# Altium PCB correctCore.PcbDoc (part 2 of 2)
Units mil, origin at the board's own origin, x right, y up, seen from the top; angles counter-clockwise.
Board outline 4175 x 4095 mil, 4 copper layers (Top Layer, GND, PWR, Bottom Layer), stack 43.711 mil thick; 90 components, 157 nets, 637 pads, 423 vias.
Unrouted connection lines stored in the file: 94.
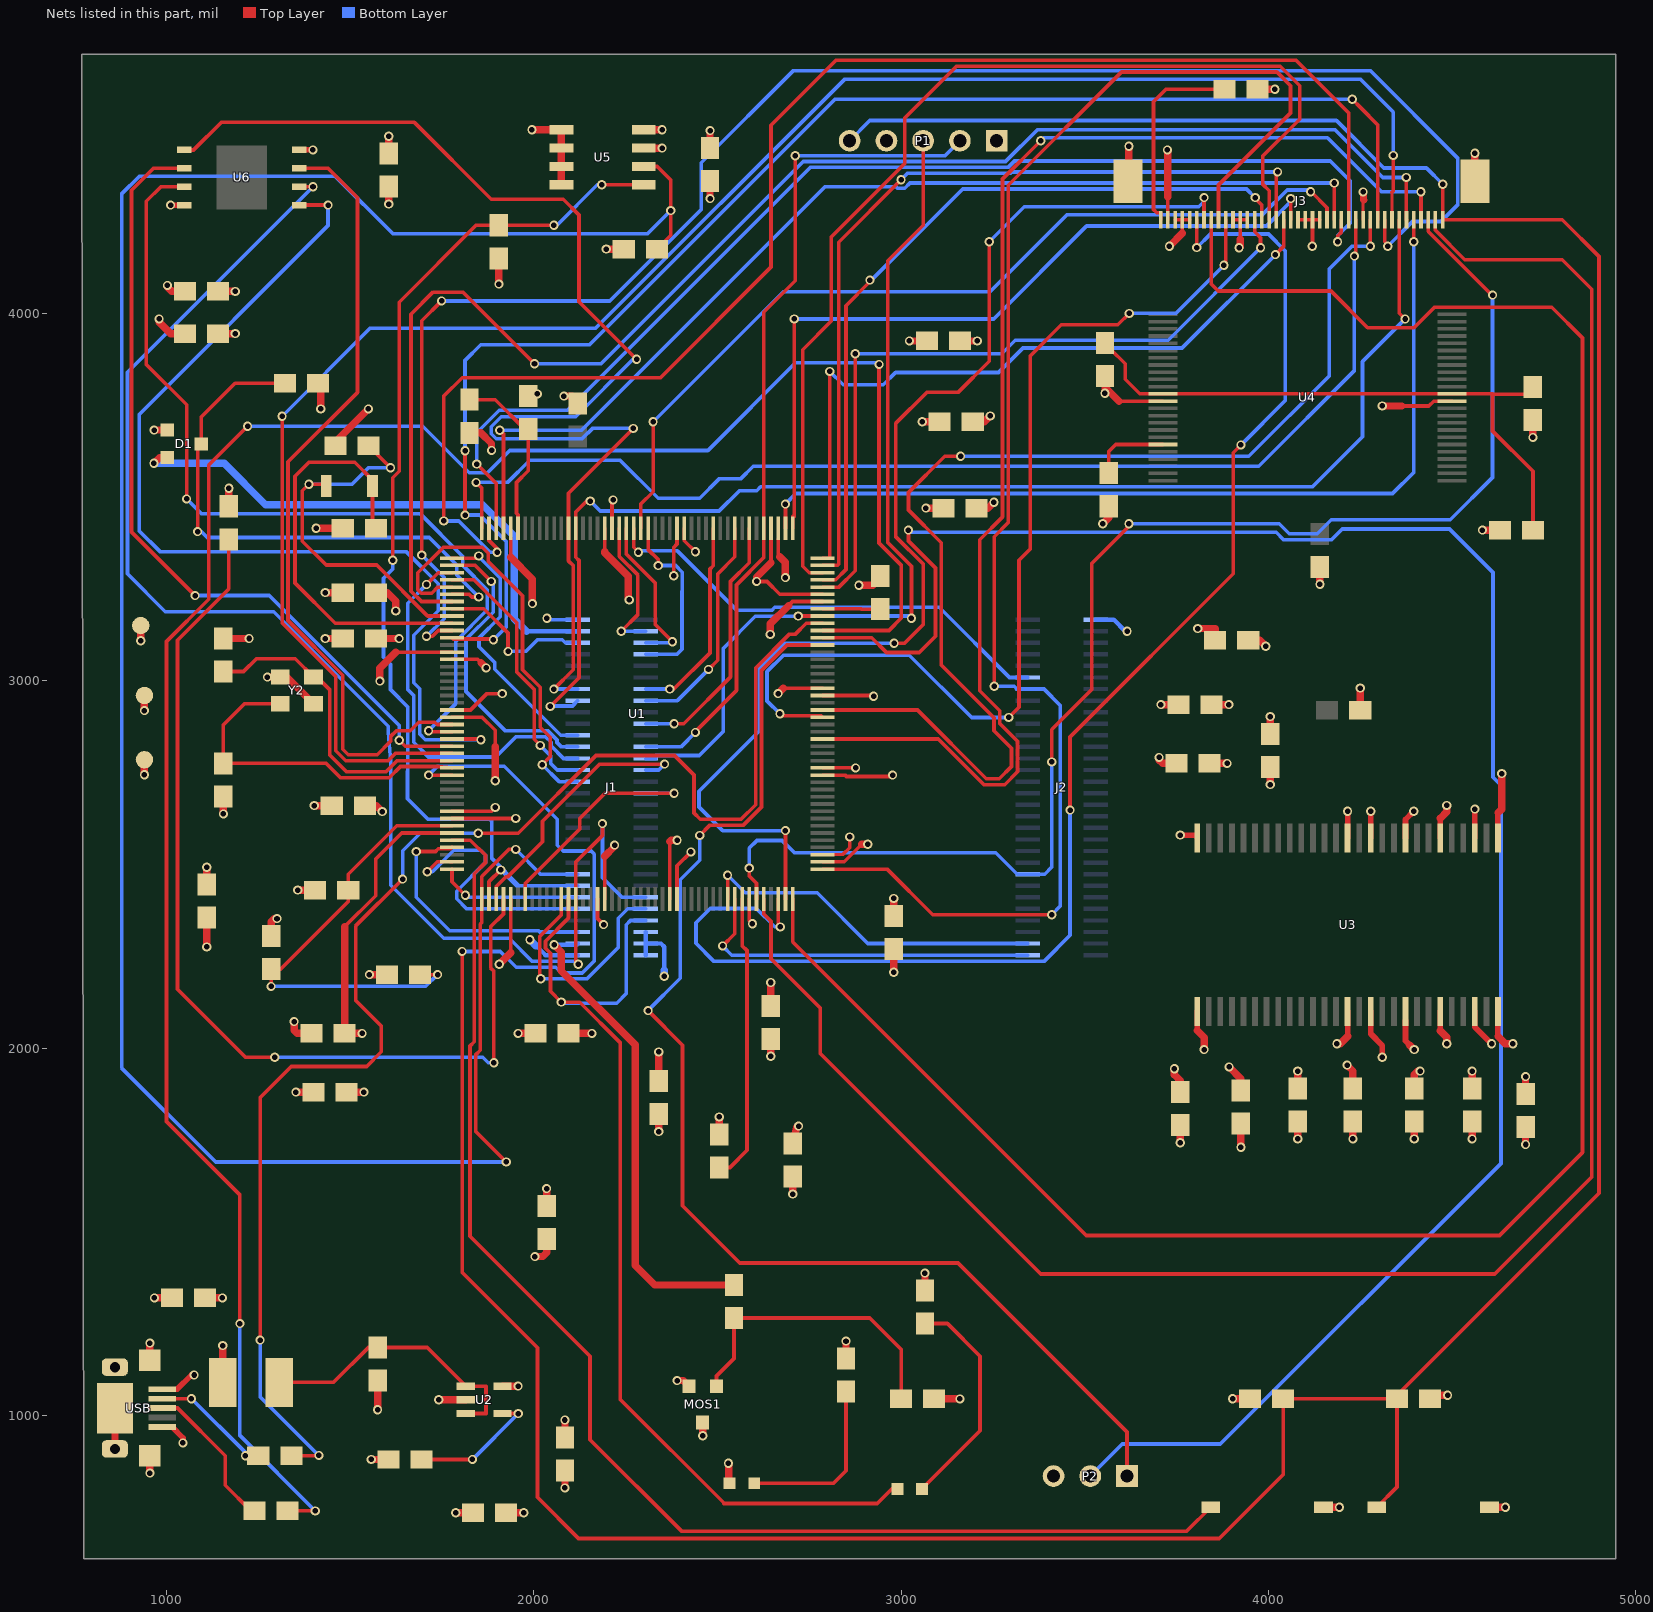
[diagram p4: the nets of this part, all layers, seen from the top]

## Via types
v1: diameter 25, hole 15, Top Layer to Bottom Layer, tented both sides, 423 vias

## Nets (pads, with @x,y where several pads share a name; then routed paths per layer and width w, separated by ;. In a path a pad name is that pad's centre, name@x,y a point inside that pad or via, vN(x,y) a via of type N, cw(c..) or ccw(c..) an arc to the next point about the centre after c; other vN are vias at no path point) (continued)
GND: C1.2 C2.1 C3.2 C4.1 C5.2 C6.1 C7.1 C8.1 C9.1 C10.1 C11.1 C12.2 C13.1 C14.1 C15.1 C16.1 C17.1 C18.1 C19.1 C20.1 C21.1 C22.1 C23.1 C24.1 C25.1 C26.1 C27.1 C28.1 C29.1 C30.1 C31.1 C32.1 C33.2 C34.2 C35.1 C36.1 C37.1 C38.1 C39.1 C40.1 C41.1 C42.1 C43.1 C44.2 C45.2 GND.1 J1.1 J1.30 J2.31 J3.3 J3.4 J3.5 J3.11 J3.12 J3.13 J3.20 J3.21 J3.22 J3.23 J3.29 J3.A J3.B P1.1 P2.3 PWR.2 R1.2 R4.2 R7.2 R14.1 RST.2 U1.14 U1.22 U1.37 U1.61 U1.71 U1.90 U1.102 U1.113 U1.126 U1.135 U1.148 U1.158 U2.2 U3.6 U3.12 U3.28 U3.41 U3.46 U3.52 U3.54 U4.13 U4.36 U5.1 U5.2 U5.3 U5.4 U5.7 U6.4 USB.5 USB.6 USB.7 USB.8 USB.9 Y2.2 Y2.4 | length 7367.9
  Top Layer w9: 2665.74,3337.25 U1.135@2665.74,3385 ; J3.29@4257.5,4255 4257.5,4304
  Top Layer w9.8: 3765.67,4217.78 J3.4@3765.67,4255
  Top Layer w9.84: 3593.26,3761.26 U4.13@3712.6,3761.26 ; J3.3@3745.98,4255 J3.4@3765.67,4255 J3.5@3785.35,4255 ; J3.11@3903.46,4255 J3.12@3923.15,4255 ; 3923.15,4201.91 J3.12@3923.15,4255 ; J3.13@3942.83,4255 J3.12@3923.15,4255 ; J3.20@4080.63,4255 J3.21@4100.32,4255 J3.22@4120,4255 ; v1@4120,4183.11 J3.22@4120,4255 ; J3.23@4139.69,4255 J3.22@4120,4255 ; 4363,3748 4436.74,3748 4450,3761.26 U4.36@4500,3761.26
  Top Layer w10: 1624.4,3077.78 U1.14@1777.18,3077.78 ; U1.37@1777.18,2625.02 v1@1940,2625.02 ; U1.22@1777.18,2920.3 1827.76,2920.3 1872.47,2965 v1(1914,2965) ; U1.61@2173.46,2405.91 2173.46,2352.54 v1(2190,2336) ; U1.158@2212.83,3415 2212.83,3489.09 v1(2216,3492.26) ; U1.71@2370.31,2405.91 2370.31,2562.31 ; U1.148@2409.68,3415 2409.68,3381.32 v1(2440,3351) ; 2693.87,3204.97 2704.47,3215.57 U1.126@2786.28,3215.57 ; U1.90@2786.28,2506.91 2844.91,2506.91 2893,2555 ; U1.102@2786.28,2743.13 2847.63,2743.13 2851.45,2739.32 2973.19,2739.32 v1(2977,2743.13) ; U1.113@2786.28,2959.67 v1@2923.33,2959.67
  Top Layer w15: v1(1011.32,4295) U6.4@1048.5,4295 ; 3806.02,2047.73 U3.28@3806.02,2100 ; 4215.47,2031.99 U3.41@4215.47,2100 ; U3.12@4278.46,2572.44 v1(4278.46,2644.6) ; U3.6@4467.44,2572.44 4467.44,2625.18 ; 4624.92,2031.99 U3.54@4624.92,2100
  Top Layer w15.75: USB.5@989,968.82 1015,968.82 1045,938.82 v1(1045,925) ; U3.46@4372.95,2075 4372.95,2019.85 4385,2007.81 ; U3.52@4561.93,2100 4561.93,2057.38 v1(4607.47,2011.84)
  Top Layer w20: USB.7@859.65,908.78 860,908.78 USB.9@860,1020 ; v1(940,2918.88) GND.1@940,2960 ; v1(955,842.97) USB.8@955,890 ; USB.9@955,1150 v1(955,1197.03) ; v1(967.5,1320) C33.2@1015,1320 ; C11.1@1155,3115 v1(1225,3115) ; v1(1155.06,2637.5) C10.1@1155.06,2685 ; R1.2@1170,3475 v1(1170,3524) ; v1(1275,3010) Y2.4@1310,3010 1327.72,3010 Y2.2@1400.55,2937.17 ; v1(1347.5,2072) 1347.5,2048 1355.5,2040 C7.1@1395,2040 ; v1(1352.5,1880) C6.1@1400,1880 ; v1(1357.5,2430) C2.1@1405,2430 ; v1(1402.5,2660) C15.1@1450,2660 ; v1(1407.5,3415) C9.1@1455,3415 ; v1(1420,3740) C1.2@1420,3803.75 ; v1(1432.5,3114.94) C14.1@1480,3114.94 ; v1(1432.5,3240) C13.1@1480,3240 ; C8.1@1460,3640 1460,3650 v1(1550,3740) ; v1(1552.5,2200) C4.1@1600,2200 ; v1(1557.5,880) C30.1@1605,880 ; v1(1575,1015.5) C29.1@1575,1095 ; v1(1581,2999) 1581,3034.38 1624.4,3077.78 ; v1(1605,4297.5) C44.2@1605,4345 ; v1(1741.21,1042.4) U2.2@1815,1042.4 ; v1(1787.5,735) C31.1@1835,735 ; v1(1957.5,2039.94) C16.1@2005,2039.94 ; R4.2@1985,3775 1991,3781 v1(2010,3781) ; v1(1995,4500) U5.1@2075,4500 U5.2@2075,4450 U5.3@2075,4400 U5.4@2075,4350 ; v1(2003,1432.5) 2024,1432.5 2035,1443.5 C27.1@2035,1480 ; v1(2082.25,3775) 2105,3775 2120,3760 R7.2@2120,3755 ; C32.1@2085,940 v1(2085,987.5) ; U5.7@2299.41,4450 v1(2349.41,4450) ; v1(2340,1772.5) C17.1@2340,1820 ; 2370.31,2562.31 2374,2566 v1(2390,2566) ; v1(2479.94,4312.5) C45.2@2479.94,4360 ; C3.2@2505,1765 v1(2505,1812.5) ; v1(2530,870) 2530.96,869.04 2530.96,817.12 PWR.2@2533.07,815 ; v1(2644,3126) 2644,3155.1 2693.87,3204.97 ; v1(2645,1977.5) C18.1@2645,2025 ; 2669.74,3337.25 2684.32,3322.68 2684.32,3281.96 v1(2685.27,3281) ; v1(2705,1602.5) C19.1@2705,1650 ; v1(2885,3260) 2923.51,3260 2943.51,3280 C5.2@2943.51,3285 ; 2893,2555 v1(2909,2555) ; v1@2923.33,2959.67 v1(2925,2958) ; v1(2980,2206.5) C34.2@2980,2270 ; R14.1@3095,1045 v1(3160,1045) ; C25.1@3160,3925.06 v1(3207.5,3925.06) ; C24.1@3195,3705.06 3226.5,3705.06 v1(3242.5,3721.06) ; C23.1@3205,3470 3236.5,3470 v1(3252.5,3486) ; v1(3555,3782.5) 3555,3799.52 ; C36.1@3555,3830 3555,3799.52 ; 3593.26,3761.26 3555,3799.52 ; J3.A@3618.03,4359.43 3620,4361.39 v1(3620,4455) ; v1(3730.47,4182.59) 3765.67,4217.78 ; v1(3760.06,1742.5) C37.1@3760.06,1790 ; 3806.02,2047.73 3825,2028.75 v1(3825,1995.84) ; C21.1@3840,2775.06 v1(3887.5,2775.06) ; C20.1@3845,2935.06 v1(3892.5,2935.06) ; v1(3920,4178.52) 3923.15,4181.67 3923.15,4201.91 ; v1(3925,1730) C38.1@3925,1795 ; C22.1@3945,3110.06 3976.5,3110.06 v1(3992.5,3094.06) ; C28.1@3970,4610 v1(4017.5,4610) ; v1(4005,2717.5) C26.1@4005,2765 ; v1(4080,1752.5) C39.1@4080,1800 ; v1(4119.47,4182.59) v1@4120,4183.11 ; v1(4186.47,2011.84) 4195.32,2011.84 4215.47,2031.99 ; v1(4230,1752.5) C40.1@4230,1800 ; v1(4257.8,4330.72) 4258.75,4329.77 4258.75,4308.91 4259.04,4308.62 ; v1(4310,3748) 4363,3748 ; 4385,2007.81 v1(4396.97,1995.84) ; v1(4396.97,1752.5) C41.1@4396.97,1800 ; C12.2@4440,1055 v1(4487.5,1055) ; 4467.44,2625.18 4485.47,2643.22 v1(4485.47,2660.6) ; v1(4554.45,1752.5) C42.1@4554.45,1800 ; J3.B@4561.91,4359.43 v1(4561.91,4435.98) ; RST.2@4602.09,750 v1(4645.18,750) ; 4624.92,2031.99 4645.07,2011.84 v1(4665.47,2011.84) ; v1(4700,1737.5) C43.1@4700,1785 ; v1(4720,3662.5) C35.1@4720,3710
  Bottom Layer w10: v1@2039.41,3166.39 J1.30@2119.96,3166.39
  Bottom Layer w11.81: 2005.7,2279 2031.7,2253 J1.1@2119.96,2253 ; J2.31@3529.39,3166.39 3578.61,3166.39 3610.11,3134.89 v1(3615.05,3134.89)
  Bottom Layer w20: v1(1989.7,2295) 2005.7,2279
  other v1: 1951,2625.02 2035.8,3170
IIC_SCL: J1.8 R20.1 U1.45 U5.6 | length 6568.4
  Top Layer w10: v1(1925,1690) 1842.5,1772.5 1842.5,1982.5 1854,1994 1854,2337.5 1858.5,2342 U1.45@1858.5,2405.91 1858.5,2466.76 1932.74,2541 v1(1951,2541) ; U5.6@2299.41,4400 2336,4400 2373,4363 v1(2373,4280) 2373,4213.06 R20.1@2335,4175.06
  Bottom Layer w10: v1(1925,1690) 1134,1690 878,1946 878,4325 926,4373 1460,4373 1616.5,4216.5 2309.5,4216.5 v1(2373,4280) ; v1(1951,2541) 2018.53,2473.47 J1.8@2119.96,2473.47
IIC_SDA: J1.7 R21.1 U1.46 U5.5 | length 2976.4
  Top Layer w10: v1(1616,3328) 1616,3552.77 1633.5,3570.27 1633.5,4030.63 1842.87,4240 R21.1@1904.94,4240 v1(2055,4240) ; U1.46@1878.19,2405.91 1878.19,2453.21 v1(1909.98,2485) ; v1(2185,4350) U5.5@2299.41,4350
  Bottom Layer w10: v1(1616,3328) 1616,3304 1591.02,3279.02 1591.02,3063.62 1610,3044.65 1610,2976 1657.27,2928.73 1657.27,2753.63 1656.5,2752.86 1656.5,2678.5 1712,2623 1880,2623 1886,2617 1886,2515.98 1960,2441.98 ; v1(1909.98,2485) 1953,2441.98 1960,2441.98 ; v1(2055,4240) 2063,4240 2173,4350 v1(2185,4350) ; J1.7@2119.96,2441.98 1960,2441.98
JTCK: J1.42 P1.2 U1.137 | length 2298.6
  Top Layer w10: v1(2440,2859.43) 2440,2862 2551.75,2973.75 2551.75,3260.75 2626.22,3335.22 U1.137@2626.22,3415 2626.22,4003.22 2712,4089 v1(2712,4429)
  Bottom Layer w10: J1.42@2305,2819.93 2400.5,2819.93 v1(2440,2859.43) ; v1(2712,4429) 2712.47,4429.47 3119.47,4429.47 P1.2@3160,4470
JTMS: J1.43 P1.3 U1.124 | length 2456.6
  Top Layer w10: v1(2720,3176.2) U1.124@2786.28,3176.2 ; v1(3028.09,3170) 3028.09,3311.91 2963.5,3376.5 2963.5,4143.5 3060,4240 P1.3@3060,4470
  Bottom Layer w10: J1.43@2305,2788.43 2332.5,2788.43 2332.5,2796.44 2450.31,2796.44 2515.5,2861.63 2515.5,3088 2603,3175.5 2719.3,3175.5 v1(2720,3176.2) 3021.89,3176.2 v1(3028.09,3170)
KEY0: J1.6 U1.44 | length 398.1
  Top Layer w10: U1.44@1777.18,2487.23 1777.18,2452.64 v1(1813.82,2416)
  Bottom Layer w10: v1(1813.82,2416) 1813.82,2410.48 J1.6@2119.96,2410.48
KEY1: J1.5 U1.43 | length 736.1
  Top Layer w10: v1(1710,2480) 1736.91,2506.91 U1.43@1751,2506.91 ; U1.43@1773.5,2506.91 U1.43@1777.18,2506.91
  Bottom Layer w10: v1(1710,2480) 1724,2480 1782.5,2538.5 1854.73,2538.5 1868.5,2524.73 1868.5,2505.27 1790.32,2427.09 1790.32,2406.27 1817.09,2379.5 1976.98,2379.5 1977.5,2378.98 J1.5@2119.96,2378.98
KEY2: J1.28 U1.8 | length 436.3
  Top Layer w10: U1.8@1777.18,3195.89 1864,3195.89 1930,3129.89 v1(1930,3080)
  Bottom Layer w10: v1(1930,3080) 1978.67,3080 2010.07,3111.4 2077.5,3111.4 2085.5,3103.39 J1.28@2119.96,3103.39
LCD_B3: J3.24 U1.154 | length 2452.6
  Top Layer w9.84: v1(4114.72,4331) 4116.37,4331 4159.37,4288 J3.24@4159.37,4255
  Top Layer w10: U1.154@2291.57,3415 2291.57,3481 2325,3514.43 v1(2325,3705)
  Bottom Layer w10: v1(2325,3705) 2679,4059 3242,4059 3452,4269 3984.09,4269 4051.21,4336.12 4109.6,4336.12 v1(4114.72,4331)
LCD_B4: J3.25 U1.173 | length 2924.8
  Top Layer w9.84: J3.25@4179.06,4255 v1@4179.06,4354.94
  Top Layer w10: v1(1907.51,3682) 1917.56,3671.95 U1.173@1917.56,3415 ; v1(4179,4355) v1@4179.06,4354.94
  Bottom Layer w10: v1(1907.51,3682) 2130.23,3682 2792.73,4344.5 2986.27,4344.5 2990.27,4340.5 3009.73,4340.5 3024.23,4355 v1(4179,4355)
LCD_B5: J3.26 U1.174 | length 3232.3
  Top Layer w9.84: v1(4188.32,4195) 4188.32,4211.42 4198.74,4221.84 J3.26@4198.74,4255
  Top Layer w10: v1(1845,3590) 1897.87,3537.13 U1.174@1897.87,3415
  Bottom Layer w10: v1(1845,3590) 1845,3675.36 1905.97,3736.33 2091.65,3736.33 2752.79,4397.47 3291.1,4397.47 3308.63,4415 4168,4415 4222,4361 4222,4245.1 4188.32,4211.42 v1(4188.32,4195)
LCD_B6: J3.27 U1.175 | length 4012.4
  Top Layer w9.84: J3.27@4218.43,4255 4218.43,4545.57
  Top Layer w10: v1(1755,3435) 1755,3775 1805,3825 2345,3825 2646,4126 2646,4512 2823,4689 4075,4689 4218.43,4545.57 ; U1.175@1878.19,3415 1878.19,3381.65 1900,3359.84 v1(1900,3350)
  Bottom Layer w10: v1(1755,3435) 1795.77,3435 1880.77,3350 v1(1900,3350)
LCD_B7: J3.28 U1.176 | length 3146.8
  Top Layer w9.84: v1@4238.11,4160.11 J3.28@4238.11,4255
  Top Layer w10: v1(1843,3540) 1858.5,3524.5 U1.176@1858.5,3415 ; v1(4234,4156) v1@4238.11,4160.11
  Bottom Layer w10: v1(1843,3540) 1928.5,3540 1989,3600.5 2234.94,3600.5 2338.69,3496.75 2451.75,3496.75 2504.5,3549.5 2563.09,3549.5 2597.66,3584.08 3973.74,3584.08 4234,3844.34 v1(4234,4156)
LCD_BL: J1.23 J3.34 U1.163 | length 3541.5
  Top Layer w9.84: 4356.22,4000.56 J3.34@4356.22,4255
  Top Layer w10: v1(2045,2930) 2123.3,3008.3 2123.3,3327.11 2114.41,3336 U1.163@2114.41,3415 2114.41,3459.55 2143.95,3489.09 v1(2154,3489.09) ; 4356.22,4000.56 v1(4372,3984.78)
  Bottom Layer w10: v1(2045,2930) 2046.32,2931.32 2105.37,2931.32 J1.23@2119.96,2945.91 ; v1(2154,3489.09) 2181.09,3462 2504.5,3462 2560,3517.5 2607,3517.5 2617.5,3528 4120,3528 4256,3664 4256,3868.78 v1(4372,3984.78)
LCD_CLK: J3.30 U1.111 | length 3245.6
  Top Layer w9.84: v1(4277.48,4182.59) J3.30@4277.48,4255
  Top Layer w10: U1.111@2786.28,2920.3 3044.7,2920.3 3232,2733 3267,2733 3300.5,2766.5 3300.5,2816.25 3252.75,2864 3252.75,2899.5 3109.5,3042.74 3109.5,3375.5 3020,3465 3020,3512.5 3118.5,3611 v1(3162,3611)
  Bottom Layer w10: v1(3162,3611) 3946.5,3611 4166,3830.5 4166,4121.23 4227.35,4182.59 v1(4277.48,4182.59)
LCD_DE: J3.33 U1.28 | length 5042.7
  Top Layer w9: J3.33@4336.54,4255 4336.54,4329.77
  Top Layer w10: v1(1315,3720) 1315,3157.37 1461,3011.37 1461,2809.57 1488.14,2782.43 1603.35,2782.43 1623.1,2802.19 U1.28@1777.18,2802.19 ; 4336.54,4329.77 4340,4333.23 v1(4340,4430)
  Bottom Layer w10: v1(1315,3720) 1555,3960 2169,3960 2846,4637 4251,4637 4340,4548 v1(4340,4430)
LCD_G2: J3.14 U1.128 | length 2004
  Top Layer w9.84: J3.14@3962.52,4255 3962.52,4222.01 3978.52,4206.01
  Top Layer w10: U1.128@2786.28,3254.94 2830.83,3254.94 2875,3299.11 v1(2875,3890) ; v1(3978.52,4178.52) 3978.52,4206.01
  Bottom Layer w10: v1(2875,3890) 3274,3890 3311,3927 3727,3927 v1(3978.52,4178.52)
LCD_G3: J3.15 U1.129 | length 2095.5
  Top Layer w9: 3982.2,4279 3982.2,4294.45
  Top Layer w10: U1.129@2786.28,3274.63 2821.91,3274.63 2850,3302.72 2850,4021 2915,4086 v1(2915,4090.75) ; v1(3964.03,4315.17) 3964.03,4312.62 3982.2,4294.45
  Bottom Layer w10: v1(2915,4090.75) 2919.75,4090.75 3167.67,4338.67 3940.53,4338.67 v1(3964.03,4315.17)
LCD_G4: J3.16 U1.130 | length 2966.3
  Top Layer w9.84: J3.16@4001.89,4255 4001.89,4334.23
  Top Layer w10: U1.130@2786.28,3294.31 2749.69,3294.31 2732,3312 2732,3901 2810,3979 2810,4208 3010,4408 3010,4532 3151,4673 4032,4673 4085,4620 4085,4528.5 3984.09,4427.59 3984.09,4352.03 4001.89,4334.23
LCD_G5: J3.17 U1.131 | length 2326.9
  Top Layer w9.84: J3.17@4021.57,4255 4021.57,4358.43
  Top Layer w10: U1.131@2786.28,3314 2826,3314 2830,3318 2830,4194 v1(3000,4364) ; 4021.57,4358.43 4021.57,4381.57 v1(4025,4385)
  Bottom Layer w10: v1(3000,4364) 3017.47,4381.47 3297.73,4381.47 3301.25,4385 v1(4025,4385)
LCD_G6: J3.18 U1.132 | length 2007.2
  Top Layer w9.84: 4041.26,4182.26 J3.18@4041.26,4255
  Top Layer w10: U1.132@2786.28,3333.68 2806,3333.68 v1(2806,3842) ; v1(4019,4160) 4041.26,4182.26
  Bottom Layer w10: v1(2806,3842) 2842.5,3805.5 2951.5,3805.5 2985,3839 3265,3839 3332,3906 3765,3906 v1(4019,4160)
LCD_G7: J3.19 U1.133 | length 2124.2
  Top Layer w9.84: J3.19@4060.94,4255 v1(4060.94,4312.62)
  Top Layer w10: U1.133@2704.96,3415 2704.96,3447 2709,3447 v1(2709,3985)
  Bottom Layer w10: v1(2709,3985) 3252,3985 3505,4238 3994.63,4238 4060.94,4304.32 v1(4060.94,4312.62)
LCD_HSYNC: J3.31 U1.12 | length 4026.3
  Top Layer w9.84: 4252,4559 4297.17,4513.83 J3.31@4297.17,4255
  Top Layer w10: U1.12@1777.18,3117.15 1780.87,3113.46 1888.09,3113.46 v1(1890.15,3111.4) ; v1(1813,3451) v1(1813,3626) ; v1(4228,4583) 4252,4559
  Bottom Layer w10: v1(1813,3451) 1852.88,3451 1925,3378.88 1925,3146.25 v1(1890.15,3111.4) ; v1(1813,3626) 1813,3872 1856,3915 2152,3915 2820,4583 v1(4228,4583)
LCD_R3: J3.6 U1.86 | length 3925.8
  Top Layer w9.84: v1(3805,4179) J3.6@3805.04,4255
  Top Layer w10: U1.86@2665.59,2405.91 2665.59,2335.41 v1(2671,2330) ; v1(3460,2648) 3460,2847 3904,3291 3904,3621 v1(3925,3642) ; v1(3805,4179) v1(3805,4179)
  Bottom Layer w10: v1(2671,2330) 2656,2330 2606,2380 2480.28,2380 2441.5,2341.22 2441.5,2285.27 2490.77,2236 3389,2236 3460,2307 v1(3460,2648) ; v1(3805,4179) 3842,4216 4000,4216 4046,4170 4046,3763 v1(3925,3642)
LCD_R4: J3.7 U1.87 | length 3298
  Top Layer w9.84: J3.7@3824.72,4255 3824.72,4304.72 v1@3825,4305
  Top Layer w10: U1.87@2685.27,2405.91 v1(2685.27,2592) ; v1(2981,3102) 3009.22,3102 3060,3152.78 3060,3317.63 2985,3392.63 2985,3700 3070,3785 3155,3785 3240,3870 v1(3240,4195)
  Bottom Layer w10: v1(2685.27,2592) 2514.03,2592 2450.03,2656 2450.03,2699.4 2614,2863.37 2614,3033.37 2682.63,3102 v1(2981,3102) ; v1(3240,4195) 3335,4290 3810,4290 v1@3825,4305
  other v1: 3825,4315.17
LCD_R5: J3.8 U1.88 | length 6201.4
  Top Layer w9.84: 3844.41,4080 J3.8@3844.41,4255
  Top Layer w10: U1.88@2704.96,2405.91 2704.96,2289.03 3503.99,1490 4629,1490 4855,1716 4855,3933 4771,4017 4452,4017 4396,3961 4270,3961 4170,4061 3863.41,4061 3844.41,4080
LCD_R6: J2.24 J3.9 U1.89 | length 4193.3
  Top Layer w9.84: J3.9@3864.09,4255 3864.09,4349.52
  Top Layer w10: U1.89@2786.28,2487.23 2961.77,2487.23 3086,2363 v1(3410,2363) ; v1(3253.5,2985) 3253.5,3392 3292,3430.5 3292,4348.77 3600.23,4657 4023,4657 4060,4620 4060,4545.43 3864.09,4349.52
  Bottom Layer w10: v1(3253.5,2985) 3307.91,2985 3315.5,2977.41 J2.24@3344.35,2977.41 3389,2977.41 3433.5,2932.91 3433.5,2386.5 v1(3410,2363)
LCD_R7: J3.10 U1.110 | length 2760.5
  Top Layer w9.84: v1@3883.78,4135.78 J3.10@3883.78,4255
  Top Layer w10: v1(2670,2910) 2675.7,2904.3 2782.59,2904.3 U1.110@2786.28,2900.61 ; v1(3293,2900) 3321,2928 3321,3328 3352,3359 3352,3885 3436,3969 3590,3969 v1(3621,4000) ; v1(3879,4131) v1@3883.78,4135.78
  Bottom Layer w10: v1(2670,2910) 2635,2945 2635,3024.83 2679.67,3069.5 3022.5,3069.5 3192,2900 v1(3293,2900) ; v1(3621,4000) 3748,4000 v1(3879,4131)
LCD_VSYNC: J3.32 U1.11 | length 4695.3
  Top Layer w9.84: J3.32@4316.85,4255 4316.85,4195.15 4325,4187 v1(4325,4182.59)
  Top Layer w10: v1(1695,3342) 1695,3980 v1(1749,4034) ; v1(1708,3121) 1724,3121 1739.83,3136.83 U1.11@1777.18,3136.83
  Bottom Layer w10: v1(1695,3342) 1756,3281 1756,3169 v1(1708,3121) ; v1(1749,4034) 2207,4034 2456,4283 2456,4410 2707,4661 4277,4661 4515,4423 4515,4295 4470,4250 4392.41,4250 v1(4325,4182.59)
LED0: DS0.2 J1.57 U1.57 | length 2824.4
  Top Layer w10: U1.57@2094.72,2405.91 2094.72,2353.79 2031.85,2290.92 2031.85,2271.46 2045.5,2257.81 2045.5,2154.54 v1(2075.04,2125) 2125,2125 2235,2015 2235,1044 2517,762 ; 2517,760 2935,760 2975,800 DS0.2@2990,800
  Bottom Layer w10: v1(2075.04,2125) 2078.16,2121.87 2225.62,2121.87 2252,2148.26 2252,2336 2263.49,2347.49 J1.57@2305,2347.49
LED1: J1.56 U1.56 | length 654.7
  Top Layer w10: v1(2019,2188.5) 2015.85,2191.65 2015.85,2302.82 2075.04,2362 U1.56@2075.04,2405.91
  Bottom Layer w10: v1(2019,2188.5) 2145,2188.5 2230.2,2273.7 2230.2,2353.18 2256,2378.98 J1.56@2305,2378.98
NetC1_1: C1.1 D1.3 U1.6 | length 1519.8
  Top Layer w10: v1(1085,3406) 1085,3635 D1.3@1095,3645 1095,3718 1186.94,3809.94 C1.1@1330,3809.94 ; U1.6@1777.18,3235.26 1823.94,3235.26 1831.16,3228.03 v1(1850,3228.03)
  Bottom Layer w10: v1(1085,3406) 1095,3406 1111,3390 1715.5,3390 1790.3,3315.2 1790.3,3287.73 v1(1850,3228.03)
NetC2_2: C2.2 C4.2 R2.1 U1.38 | length 1258.7
  Top Layer w10: v1(1285,2168) R2.1@1285,2215 1311,2215 1495,2399 C2.2@1495,2430 1495,2473.34 1627,2605.34 U1.38@1777.18,2605.34 ; C4.2@1690,2200 v1(1738,2200)
  Bottom Layer w10: v1(1285,2168) 1706,2168 v1(1738,2200)
NetC3_1: C3.1 U1.81 | length 784.7
  Top Layer w10: C3.1@2505,1675 2534,1675 2580.52,1721.52 2580.52,2265.48 2567.16,2278.84 U1.81@2567.16,2405.91
NetC5_1: C5.1 U1.125 | length 157.6
  Top Layer w10: U1.125@2786.28,3195.89 2891,3195.89 2891.89,3195 C5.1@2943.51,3195
NetC8_2: C8.2 U1.9 Y1.1 | length 1028.6
  Top Layer w10: Y1.1@1435,3530 1430,3535 v1(1388,3535) 1370,3517 1370,3380 1435,3315 1572.25,3315 1711.04,3176.2 U1.9@1777.18,3176.2 ; C8.2@1550,3640 v1(1610,3580)
  Bottom Layer w10: v1(1388,3535) 1505,3535 1550,3580 v1(1610,3580)
NetC9_2: C9.2 U1.10 Y1.2 | length 1148.5
  Top Layer w10: C9.2@1545,3415 1560.98,3430.98 Y1.2@1560.98,3530 1560.98,3546.5 1512.48,3595 1388,3595 1350,3557 1350,3266 1459.48,3156.52 U1.10@1777.18,3156.52
NetC10_2: C10.2 U1.30 Y2.1 | length 934.7
  Top Layer w10: Y2.1@1310,2937.17 1212.23,2937.17 1155.06,2880 C10.2@1155.06,2775 1434.96,2775 1473.87,2736.08 1606.56,2736.08 1637.11,2766.63 1739.49,2766.63 U1.30@1777.18,2762.82
NetC11_2: C11.2 U1.29 Y2.3 | length 876.8
  Top Layer w10: C11.2@1155,3025 1210,3025 1245,3060 1350.55,3060 Y2.3@1400.55,3010 ; Y2.3@1400.54,2998.99 1421.01,2998.99 1445,2975 1445,2796.96 1489.87,2752.08 1597.83,2752.08 1628.38,2782.63 1755.49,2782.63 1755.49,2782.5 U1.29@1777.18,2782.5
NetC28_2: C28.2 J3.1 | length 542.4
  Top Layer w9.84: 3687,4576 3687,4283 3696,4274 3706.61,4274 J3.1@3706.61,4255
  Top Layer w10: 3687,4576 3721,4610 C28.2@3880,4610
NetC29_2: C29.2 F1.2 U2.1 U2.3 | length 776
  Top Layer w10: F1.2@1306.77,1090 1455,1090 1550,1185 C29.2@1575,1185 1709.8,1185 U2.1@1815,1079.8 1870,1079.8 1870,1005 U2.3@1815,1005
NetC30_2: C30.2 U2.4 | length 357.8
  Top Layer w10: C30.2@1695,880 v1(1833,880) ; U2.4@1915,1005 v1(1958,1005)
  Bottom Layer w10: v1(1833,880) v1(1958,1005)
NetC35_2: C35.2 C36.2 R16.1 U4.12 U4.37 | length 1661
  Top Layer w9.84: 3610,3821 3650.05,3780.95 U4.12@3712.6,3780.95 U4.37@4500,3780.95 4610,3780.95
  Top Layer w10: C36.2@3570,3915 3570,3902.63 3610,3862.63 3610,3821 ; R16.1@4720,3410 4720,3570 4610,3680 4610,3780 4700,3780 C35.2@4720,3800
NetDS0_1: DS0.1 R10.2 | length 613.4
  Top Layer w10: DS0.1@3056.93,800 3215,958.07 3215,1161 3126,1250 R10.2@3064.94,1250
NetMOS1_1: MOS1.1 R13.2 R14.2 | length 830.7
  Top Layer w10: MOS1.1@2497.4,1079.21 2497.4,1107.4 2545,1155 R13.2@2545,1265 2915,1265 3000,1180 R14.2@3000,1045
NetPWR_1: PWR.1 R15.1 | length 480.1
  Top Layer w10: PWR.1@2600,815 2816,815 2850,849 R15.1@2850,1065
NetR1_1: R1.1 U1.48 | length 2691.5
  Top Layer w10: R1.1@1170,3385 1170,3250 1030,3110 1030,2160 1215,1975 v1(1295,1975) ; v1(1891.49,1960) 1891.49,2209.27 1882.5,2218.27 1882.5,2329.94 1917.56,2365 U1.48@1917.56,2405.91
  Bottom Layer w10: v1(1295,1975) 1861,1975 1876,1960 v1(1891.49,1960)
NetR4_1: R4.1 R5.1 U1.171 | length 478
  Top Layer w10: R5.1@1825,3765 1895,3765 1975,3685 R4.1@1985,3685 1985,3571.53 1953,3539.53 1953,3455.93 1956.93,3452 U1.171@1956.93,3415
NetR11_2: R11.2 USB.3 | length 400.3
  Top Layer w10: USB.3@989,1020 1030,1020 1160,890 1160,810 R11.2@1227.47,742.53
NetR12_2: R12.2 USB.2 | length 331.9
  Top Layer w10: USB.2@989,1045.59 v1(1068.2,1045.59) ; v1(1215,890.06) 1249.06,890.06 1250,891 R12.2@1250,890.06
  Bottom Layer w10: v1(1068.2,1045.59) 1215,898.79 v1(1215,890.06)
NetR18_1: R18.1 U4.19 | length 214.6
  Top Layer w9.84: 3584,3643.15 U4.19@3712.6,3643.15
  Top Layer w10: R18.1@3565,3565 3565,3624.15 3584,3643.15
NRF_CE: J2.25 U1.155 | length 1285.5
  Top Layer w10: U1.155@2271.89,3415 2271.89,3363.11 v1(2285,3350)
  Bottom Layer w10: v1@2285,3345.5 v1(2285,3350) 2288.5,3353.5 2391,3353.5 2553,3191.5 2647.67,3191.5 2656.17,3200 3103.9,3200 3295,3008.9 J2.25@3344.35,3008.9
NRF_CS: J1.34 U1.153 | length 467
  Top Layer w10: 2311.26,3381.32 2311.26,3357.44 2338.69,3330 v1(2338.69,3313.5)
  Bottom Layer w10: J1.34@2305,3071.9 2389.9,3071.9 2403.5,3085.5 2403.5,3243.73 2404.5,3244.73 2404.5,3295.49 2386.49,3313.5 v1(2338.69,3313.5)
PA0: U1.40 WKUP.1 | length 3671.7
  Top Layer w10: U1.40@1777.18,2565.97 1827.27,2565.97 1868.5,2524.73 1868.5,2505.27 1838,2474.77 1838,2017 1826.5,2005.5 1826.5,1487.5 2153,1161 2153,934 2402,685 3777.91,685 WKUP.1@3842.91,750
PA1: J1.3 U1.41 | length 705.4
  Top Layer w10: v1(1680,2535) 1732.55,2535 1740.15,2542.6 1773.5,2542.6 U1.41@1777.18,2546.28
  Bottom Layer w10: v1(1680,2535) 1680,2410.63 1771.14,2319.48 2013.2,2319.48 2016.7,2315.99 J1.3@2119.96,2315.99
PA3: J1.44 U1.47 | length 720.8
  Top Layer w10: U1.47@1897.87,2405.91 1897.87,2440 1923.87,2466 1928.5,2466 2023.9,2561.4 2023.9,2617.73 2179.1,2772.94 v1(2356,2772.94)
  Bottom Layer w10: J1.44@2305,2756.94 2340,2756.94 v1(2356,2772.94)
PA5: J1.46 U1.51 | length 643
  Top Layer w10: U1.51@1976.61,2405.91 1976.61,2448 2124.98,2596.36 2124.98,2625.02 2193.9,2693.95 v1(2381.93,2693.95)
  Bottom Layer w10: J1.46@2305,2693.95 v1(2381.93,2693.95)
PA9: P2.1 U1.120 | length 3457.4
  Top Layer w10: v1(2311,2102) 2405,2008 2405,1571 2561,1415 3155,1415 3615,955 P2.1@3615,835 ; v1(2452,2579) 2480,2607 2571,2607 2620,2656 2620,3028 2689.46,3097.46 U1.120@2786.28,3097.46
  Bottom Layer w10: v1(2311,2102) 2399,2190 2399,2458 2452,2511 v1(2452,2579)
PA10: P2.2 U1.121 | length 5412.7
  Top Layer w10: U1.121@2786.28,3117.15 2920.01,3117.15 2960.15,3077 3049.63,3077 3093.5,3120.87 3093.5,3306.75 3020,3380.25 v1(3020,3410)
  Bottom Layer w10: v1(3020,3410) 3026,3404 4021.08,3404 4041,3384.08 4172,3384.08 4200.92,3413 4493,3413 4611.5,3294.5 4611.5,2737.33 4632.93,2715.91 4632.93,1685.93 3869,922 3602,922 P2.2@3515,835
PA11: R11.1 U1.122 | length 6127.7
  Top Layer w10: v1(1200,1250) 1200,1600 1000,1800 1000,3107 1115,3222 1115,3587 v1(1221,3693) ; R11.1@1330,740.06 v1(1405,740.06) ; U1.122@2786.28,3136.83 2966.83,3136.83 3000,3170 3000,3315 2940,3375 v1(2940,3861)
  Bottom Layer w10: v1(1200,1250) 1200,945.06 v1(1405,740.06) ; v1(1221,3693) 1698,3693 1824.5,3566.5 1874,3566.5 1934.5,3627 2474,3627 2712.5,3865.5 2935.5,3865.5 v1(2940,3861)
PA12: R12.1 U1.123 | length 3948.5
  Top Layer w10: v1(1255,1205) 1255,1865 1340,1950 1545,1950 1585,1990 1585,2060 1515,2130 1515,2332 v1(1643,2460) ; R12.1@1340,890.06 1414.06,890.06 v1(1415,891) ; v1(1849,2585) 1958,2585 2169.44,2796.44 2383,2796.44 2436,2743.44 2436,2640 2453,2623 2564.37,2623 2604,2662.63 2604,3034.63 2696.37,3127 2712.48,3127 2742,3156.52 U1.123@2786.28,3156.52
  Bottom Layer w10: v1(1255,1205) 1255,1051 v1(1415,891) ; v1(1643,2460) 1643,2537 1691,2585 v1(1849,2585)
PB2: J1.55 U1.58 U6.6 | length 3918.2
  Top Layer w10: U6.6@1361.5,4345 v1(1399,4345) ; v1(2121,2228) 2114.41,2234.59 U1.58@2114.41,2405.91 2114.41,2506.41 2187,2579 v1(2187,2611)
  Bottom Layer w10: v1(1399,4345) 894,3840 894,3291 997,3188 1292,3188 1604,2876 1604,2861 1611,2778 1611,2443 1755,2299 1933,2299 1996,2236 2113,2236 v1(2121,2228) ; v1(2187,2611) 2187,2463.48 2240,2410.48 J1.55@2305,2410.48
PB6: J1.24 U1.164 U6.1 | length 3438.3
  Top Layer w10: U6.1@1048.5,4445 1074,4445 1149,4520 1675,4520 1884,4311 2080,4311 2123,4268 2123,4032 v1(2280,3875) ; v1(2055,2977.41) 2107.3,3029.71 2107.3,3313.7 2094.72,3326.28 U1.164@2094.72,3415 2094.72,3510.72 v1(2271,3687)
  Bottom Layer w10: v1(2055,2977.41) J1.24@2119.96,2977.41 ; v1(2271,3687) 2159.89,3687 2131.39,3658.5 1897.77,3658.5 1884.01,3672.27 1884.01,3691.73 1911.27,3719 2114,3719 2270,3875 v1(2280,3875)
PB10: J2.2 U1.79 | length 958.1
  Top Layer w10: U1.79@2527.79,2405.91 v1(2527.79,2470.43)
  Bottom Layer w10: v1(2527.79,2470.43) 2575.7,2422.53 2771.47,2422.53 2909.5,2284.5 J2.2@3344.35,2284.5
PB11: J2.1 U1.80 | length 982.5
  Top Layer w10: v1(2514,2278) 2547.48,2311.48 U1.80@2547.48,2405.91
  Bottom Layer w10: v1(2514,2278) 2539,2253 J2.1@3344.35,2253
PC10: J1.40 U1.139 | length 709.3
  Top Layer w10: v1(2381.93,2882.92) 2408.22,2882.92 2535.75,3010.46 2535.75,3270.24 2586.85,3321.33 U1.139@2586.85,3415
  Bottom Layer w10: J1.40@2305,2882.92 v1(2381.93,2882.92)
PC12: J1.38 U1.141 | length 619.9
  Top Layer w10: v1(2475.69,3030.63) 2500.87,3055.81 2500.87,3290.64 2547.48,3337.25 U1.141@2547.48,3415
  Bottom Layer w10: J1.38@2305,2945.91 2390.97,2945.91 v1(2475.69,3030.63)
PD2: J1.37 U1.144 | length 558.3
  Top Layer w10: v1(2370,2977.41) 2381.41,2977.41 2479.73,3075.73 2479.73,3304.01 2488.42,3312.71 U1.144@2488.42,3415
  Bottom Layer w10: J1.37@2305,2977.41 v1(2370,2977.41)
PE2: J1.20 U1.1 | length 737.8
  Top Layer w10: U1.1@1777.18,3333.68 U1.1@1791.68,3333.68 ; U1.1@1805,3333.68 1843.68,3333.68 v1(1850,3340)
  Bottom Layer w10: v1(1850,3340) 1850,3337.8 1909,3278.8 1909,3174.17 1851,3116.17 1851,3092.27 1893.5,3049.77 1893.5,3031.45 2073.52,2851.43 J1.20@2119.96,2851.43
PE3: J1.19 U1.2 | length 828.4
  Top Layer w10: U1.2@1777.18,3314 1840.57,3314 v1(1884.16,3270.41)
  Bottom Layer w10: v1(1884.16,3270.41) 1889.5,3265.06 1889.5,3186.72 1815.5,3112.72 1815.5,2970.85 1922.85,2863.5 2038.63,2863.5 2063.29,2838.84 2063.29,2832.08 2075.44,2819.93 J1.19@2119.96,2819.93
PE4: J1.18 U1.3 | length 1056.2
  Top Layer w10: v1(1708,3262) 1740.31,3294.31 U1.3@1777.18,3294.31
  Bottom Layer w10: v1(1708,3262) 1657,3211 1657,2975.99 1673.27,2959.72 1673.27,2832.73 1713.5,2792.5 1896.57,2792.5 1951.57,2847.5 2032,2847.5 2047.29,2832.21 2047.29,2822.22 2081.07,2788.43 J1.18@2119.96,2788.43
PE5: J1.17 U1.4 | length 727.3
  Top Layer w10: U1.4@1777.18,3274.63 1836.64,3274.63 1953.5,3157.77 1953.5,3023.61 2001,2976.11 2001,2840.5 v1(2017.5,2824)
  Bottom Layer w10: v1(2017.5,2824) 2046.5,2795 2046.5,2774.44 2064,2756.94 J1.17@2119.96,2756.94
PE6: J1.16 U1.5 | length 1147.4
  Top Layer w10: U1.5@1777.18,3254.94 1738.44,3254.94 1722,3238.5 1694,3238.5 1684.5,3248 1684.5,3293.88 1733.7,3343.08 1733.7,3343.24 1753.97,3363.5 1859.73,3363.5 1876.38,3346.86 1876.38,3324.62 1969.5,3231.5 1969.5,3030.24 2017.5,2982.24 2017.5,2873.44 2045,2845.94 2045,2793.44 v1(2023,2771.44)
  Bottom Layer w10: v1(2023,2771.44) 2069,2725.44 J1.16@2119.96,2725.44
PF6: U1.24 U6.7 | length 2183.8
  Top Layer w10: U6.7@1361.5,4395 1440,4395 1520,4315 1520,3785 1331,3596 1331,3164 1480,3015 1480,2813.19 1494.77,2798.43 1573.66,2798.43 1610.27,2835.03 1610.27,2848 1626.07,2863.81 1663.51,2863.81 1687.01,2887.31 1730.69,2887.31 1737.07,2880.93 U1.24@1777.18,2880.93
PF7: U1.25 U6.3 | length 2425.4
  Top Layer w10: U6.3@1048.5,4345 985,4345 945,4305 945,3861 1055,3751 v1(1055,3495) ; v1(1713.5,2863.81) 1716.06,2861.24 U1.25@1777.18,2861.24
  Bottom Layer w10: v1(1055,3495) 1095,3455 1690,3455 1806.3,3338.7 1806.3,3315.03 1873.5,3247.83 1873.5,3193.34 1788,3107.84 1788,2938.31 v1(1713.5,2863.81)
PF8: U1.26 U6.5 | length 2749
  Top Layer w10: U6.5@1361.5,4295 v1(1440,4295) ; U1.26@1777.18,2841.56 1853.96,2841.56 v1(1856.23,2839.28)
  Bottom Layer w10: v1(1440,4295) 1440,4239 926,3725 926,3407.86 982.36,3351.5 1652.2,3351.5 1740,3263.7 1740,3190.72 1673,3123.72 1673,2994.24 1689.27,2977.97 1689.27,2854.81 1704.79,2839.28 v1(1856.23,2839.28)
PF9: U1.27 U6.2 | length 2235.5
  Top Layer w10: U6.2@1048.5,4395 965,4395 905,4335 905,3405 v1(1078,3232) ; v1(1633.77,2838) 1649.89,2821.87 U1.27@1777.18,2821.87
  Bottom Layer w10: v1(1078,3232) 1279.71,3232 1633.77,2877.94 v1(1633.77,2838)
PG3: J3.37 U1.107 | length 3602
  Top Layer w9.84: J3.37@4415.28,4255 v1@4415.28,4330.72
  Top Layer w10: U1.107@2786.28,2841.56 3100.82,2841.56 3225.37,2717 3282,2717 3317,2752 3317,2835.22 3268.89,2883.33 3268.89,2918.11 3214,2973 3214,3384 3276,3446 3276,4366 v1(3380,4470) ; v1(4415,4331) v1@4415.28,4330.72
  Bottom Layer w10: v1(3380,4470) 3388.5,4478.5 4160.5,4478.5 4308,4331 v1(4415,4331)
PG13: J1.33 U1.156 | length 434.5
  Top Layer w10: U1.156@2252.2,3415 2252.2,3344.37 2330.5,3266.07 2330.5,3152.99 v1(2377.49,3106)
  Bottom Layer w10: J1.33@2305,3103.39 2374.88,3103.39 v1(2377.49,3106)
PG14: J1.32 U1.157 | length 387
  Top Layer w10: U1.157@2232.52,3415 2232.52,3338.52 2283.5,3287.53 2283.5,3180.32 v1(2238.07,3134.89)
  Bottom Layer w10: v1(2238.07,3134.89) J1.32@2305,3134.89
PH6: J2.8 J3.38 U1.83 | length 3886.3
  Top Layer w9.84: J3.38@4434.96,4255 4434.96,4223.17 v1@4608.13,4050
  Top Layer w10: v1(2586.85,2489.89) 2586.85,2468.57 2606.53,2448.89 U1.83@2606.53,2405.91 ; v1(3410,2779) 3410,2867 3519,2976 3519,3319 3620,3420 v1(3620,3427.5) ; v1@4608.13,4050 v1(4610,4050)
  Bottom Layer w10: v1(2586.85,2489.89) 2586.85,2544.35 2607.5,2565 2675.99,2565 2709.49,2531.5 3257.89,2531.5 3315.92,2473.47 J2.8@3344.35,2473.47 3390.8,2473.47 3410,2492.68 v1(3410,2779) ; v1(3620,3427.5) 4029.58,3427.5 4057,3400.08 4133.2,3400.08 4171.12,3438 4495,3438 4610,3553 v1(4610,4050)
PH7: J3.39 U1.84 | length 5880.1
  Top Layer w9.84: J3.39@4454.65,4255 4454.65,4226 4534.65,4146
  Top Layer w10: U1.84@2626.22,2405.91 2626.22,2364.78 2645.9,2345.1 2645.9,2243.1 2780,2109 2780,1985 3380,1385 4616,1385 4880,1649 4880,4066 4800,4146 4534.65,4146
PI3: J3.36 U1.134 | length 2500.3
  Top Layer w9.84: v1(4395.59,4195) J3.36@4395.59,4255
  Top Layer w10: v1(2685,3481) 2685.27,3480.73 U1.134@2685.27,3415
  Bottom Layer w10: v1(2685,3481) 2713.5,3509.5 4338,3509.5 4395.59,3567.09 v1(4395.59,4195)
PI8: J3.35 U1.7 | length 4124.7
  Top Layer w9.84: v1(4375,4370) 4375,4255.91 J3.35@4375.91,4255
  Top Layer w10: U1.7@1777.18,3215.57 1694.3,3215.57 1666,3243.87 1666,3998 1726,4058 1807,4058 v1(2002,3863)
  Bottom Layer w10: v1(2002,3863) 2183,3863 2733.47,4413.47 3284.47,4413.47 3371,4500 4181,4500 4311,4370 v1(4375,4370)
RESET: C12.1 J1.10 J3.40 P1.5 R6.1 RST.1 U1.31 | length 11508.3
  Top Layer w9.84: v1(4474.33,4351.67) J3.40@4474.33,4255 4800,4255
  Top Layer w10: v1(1713.5,2743.13) U1.31@1777.18,2743.13 ; v1(1805,2263) 1805,1389 2010,1184 2010,777 2122,665 3866,665 4040,839 R6.1@4040,1045.13 C12.1@4350,1045.06 C12.1@4350,1045.06 4350,805 RST.1@4295,750 ; C12.1@4350,1055 4900,1605 4900,4155 4800,4255
  Bottom Layer w10: v1(1713.5,2743.13) 1737.87,2767.5 1919.5,2767.5 2064,2623 2064,2552.46 2080,2536.46 J1.10@2119.96,2536.46 2156.54,2536.46 2165,2528 2165,2237.21 2132.29,2204.5 2075.43,2204.5 2059.93,2220 1952,2220 1909,2263 v1(1805,2263) ; P1.5@2860,4470 2915,4525 4185,4525 4314,4396 4430,4396 v1(4474.33,4351.67)
VBAT: D1.2 J1.29 | length 1518
  Top Layer w20: v1(966,3592) 981.6,3607.6 D1.2@1002.48,3607.6
  Bottom Layer w11.81: 1980.11,3134.89 J1.29@2119.96,3134.89
  Bottom Layer w20: v1(966,3592) 1157,3592 1269.5,3479.5 1860.5,3479.5 1947,3393 1947,3168 1980.11,3134.89
VCC3.3: 3.3V.1 C31.2 C32.2 C37.2 C38.2 C39.2 C40.2 C41.2 C42.2 C43.2 C44.1 C45.1 MOS1.2 P1.4 R6.2 R8.1 R9.1 R16.2 R17.1 R18.2 R19.1 R20.2 R21.2 U2.5 U3.1 U3.3 U3.9 U3.14 U3.27 U3.43 U3.49 U5.8 U6.8 WKUP.2 | length 2079.5
  Top Layer w15: U6.8@1361.5,4445 v1(1398.68,4445) ; v1(3760,2580) U3.27@3804,2580 ; U3.27@3806.02,2572.44 U3.27@3806.02,2581.02 ; U3.14@4215.47,2572.44 v1(4215.47,2644.6) ; 4467.44,2047.26 U3.49@4467.44,2100 ; U3.3@4561.93,2572.44 v1(4561.93,2650.53) ; U3.1@4624.92,2572.44 4624.92,2640.45
  Top Layer w15.75: U3.43@4278.46,2100 4278.46,2038.85 4310,2007.31 v1(4310,1975) ; U3.9@4372.95,2572.44 4372.95,2622.08 v1(4395.47,2644.6)
  Top Layer w20: v1(930,3108.88) 3.3V.1@930,3150 ; v1(980,3985) 980,3976.37 1011.44,3944.94 R9.1@1050,3944.94 ; v1(1002.5,4076) 1002.5,4072 1014.5,4060 R8.1@1050,4060 ; C44.1@1605,4435 v1(1605,4482.5) ; v1(1904.94,4080) R21.2@1904.94,4150 ; U2.5@1915,1079.8 v1(1957.5,1079.8) ; C31.2@1925,735 v1(1972.5,735) ; v1(2085,802.5) C32.2@2085,850 ; v1(2197.5,4175.06) R20.2@2245,4175.06 ; U5.8@2299.41,4500 v1(2349.41,4500) ; v1(2390,1095) 2406.81,1095 MOS1.2@2422.6,1079.21 ; C45.1@2479.94,4450 v1(2479.94,4497.5) ; v1(3549,3427.5) 3565,3443.5 R18.2@3565,3475 ; v1(3744.06,1943.5) 3744.06,1927.5 3760.06,1911.5 C37.2@3760.06,1880 ; v1(3893,1948.5) 3925,1916.5 C38.2@3925,1885 ; v1(3902.5,1045.13) R6.2@3950,1045.13 ; C39.2@4080,1890 v1(4080,1937.5) ; v1(4140,3262.5) R17.1@4140,3310 ; WKUP.2@4150,750 v1(4193.09,750) ; v1(4214,1953.5) 4230,1937.5 C40.2@4230,1890 ; R19.1@4250,2920.06 v1(4250,2980) ; C41.2@4396.97,1890 4396.97,1928 4406.47,1937.5 v1(4412.97,1937.5) ; 4467.44,2047.26 4485.47,2029.22 v1(4485.47,2011.84) ; C42.2@4554.45,1890 v1(4554.45,1937.5) ; v1(4582.5,3410) R16.2@4630,3410 ; 4624.92,2640.45 4635,2650.53 v1(4635,2747.07) ; C43.2@4700,1875 v1(4700,1922.5)
VCC3.3M: C13.2 C14.2 C15.2 C16.2 C17.2 C18.2 C19.2 C20.2 C21.2 C22.2 C23.2 C24.2 C25.2 C26.2 C27.2 D1.1 R3.2 R5.2 R8.2 R9.2 U1.15 U1.23 U1.36 U1.49 U1.62 U1.72 U1.82 U1.91 U1.103 U1.114 U1.127 U1.136 U1.149 U1.159 U1.172 | length 3461.4
  Top Layer w9: 1937.24,3336 U1.172@1937.24,3387.52 ; U1.91@2786.28,2527 2842.63,2527
  Top Layer w10: U1.36@1777.18,2644.71 1884.71,2644.71 v1(1895,2655) ; U1.23@1777.18,2900.61 1859.39,2900.61 1895,2865 1895,2820.83 ; U1.15@1777.18,3058.09 1847.49,3058.09 1856.23,3049.34 ; 1937.24,2259.24 U1.49@1937.24,2405.91 ; U1.62@2193.15,2405.91 2193.15,2521.8 ; 2193.15,3351.1 U1.159@2193.15,3415 ; v1(2381,3285.76) 2381,3363 2390,3372 U1.149@2390,3415 ; U1.72@2390,2405.91 2390,2496 v1(2428,2534) ; U1.82@2586.85,2405.91 2586.85,2347.15 v1(2595.43,2338.57) ; v1(2606.53,3270.24) 2634.76,3270.24 2669.74,3235.26 U1.127@2786.28,3235.26 ; 2645.9,3320.9 U1.136@2645.9,3415 ; 2679.35,2979.35 U1.114@2786.28,2979.35 ; U1.103@2786.28,2762.82 v1(2875.98,2762.82) ; 2842.63,2528 2860,2545.37 v1@2860,2573.65
  Top Layer w20: v1(966.28,3682.4) D1.1@1002.48,3682.4 ; R3.2@1110,2445 v1(1110,2492.5) ; R9.2@1140,3944.94 v1(1187.5,3944.94) ; R8.2@1140,4060 v1(1187.5,4060) ; C15.2@1540,2660 1571.5,2660 v1(1587.5,2644) ; C14.2@1570,3114.94 v1(1633.5,3114.94) ; C13.2@1570,3240 1601.5,3240 1624.4,3217.1 v1(1624.4,3190) ; R5.2@1825,3675 1856,3675 1885,3646 v1(1885,3627) ; 1856.23,3049.34 v1@1871.88,3033.7 ; v1(1895,2727.66) 1895,2820.83 ; v1(1906,2228) 1937.24,2259.24 ; 1937.24,3336 1996.3,3276.95 v1(1996.3,3210) ; C27.2@2035,1570 v1(2035,1617.5) ; C16.2@2095,2039.94 v1(2158.5,2039.94) ; 2193.15,2521.8 2220,2548.65 v1(2220,2552.46) ; 2193.15,3351.1 2193.15,3348.19 2257.07,3284.27 2257.07,3222.93 v1(2260,3220) ; C17.2@2340,1910 v1(2340,1989.5) ; v1(2606.53,3270.24) 2606.53,3281.53 2645.9,3320.9 ; C18.2@2645,2115 v1(2645,2178.5) ; v1(2665,2965) 2679.35,2979.35 ; C19.2@2705,1740 2716.5,1787.5 v1(2721,1787.5) ; v1@2860,2573.65 v1(2860,2575) ; v1(3022.5,3925.06) C25.2@3070,3925.06 ; v1(3057.5,3705.06) C24.2@3105,3705.06 ; v1(3067.5,3470) C23.2@3115,3470 ; v1(3702.5,2791.06) 3702.5,2784 3711.44,2775.06 C21.2@3750,2775.06 ; v1(3707.5,2935.06) C20.2@3755,2935.06 ; v1(3807.5,3142.06) 3855,3142.06 C22.2@3855,3110.06 ; C26.2@4005,2855 v1(4005,2902.5)
  other v1: 1870,3035
VCC5: 5V.1 C33.1 F1.1 J1.58 J1.59 J1.60 J3.2 USB.1 | length 671.9
  Top Layer w9.84: J3.2@3726.3,4255 3726.3,4317
  Top Layer w10: USB.1@989,1071.18 1029.38,1071.18
  Top Layer w15: 1029.38,1071.18 v1@1068.2,1110
  Top Layer w20: v1(940,2743.88) 5V.1@940,2785 ; C33.1@1105,1320 v1(1152.5,1320) ; F1.1@1153.23,1090 1152.5,1090.73 1153.23,1091.46 v1(1153.23,1190) ; v1(3725,4445) 3726.3,4443.7 3726.3,4317
  Bottom Layer w11.81: J1.60@2305,2253 J1.59@2305,2284.5 ; J1.58@2305,2315.99 J1.59@2305,2284.5 ; 2355.26,2211.69 2355.26,2275.69 2346.45,2284.5 J1.59@2305,2284.5
  Bottom Layer w20: v1(2355.26,2195.69) 2355.26,2211.69
  other v1: 1075.19,1110
VCC_LED: C34.1 MOS1.3 R10.1 R15.2 | length 178.7
  Top Layer w20: v1(2460,944.59) MOS1.3@2460,980.79 ; R15.2@2850,1155 v1(2850,1202.5) ; C34.1@2980,2360 v1(2980,2407.5) ; R10.1@3064.94,1340 v1(3064.94,1387.5)
VDDA: C6.2 C7.2 R2.2 R3.1 U1.39 | length 979.7
  Top Layer w10: 1485,2330 1570,2415 1570,2515 1640.65,2585.65 U1.39@1777.18,2585.65
  Top Layer w20: v1(1110,2275.5) R3.1@1110,2355 ; R2.2@1285,2305 1285,2344 1293.5,2352.5 v1(1301,2352.5) ; 1485,2330 C7.2@1485,2040 v1(1532.5,2040) ; C6.2@1490,1880 v1(1537.5,1880)
VREF+: J1.2 R13.1 | length 1321.5
  Top Layer w20: v1(2055.35,2281.19) 2075.04,2261.51 2075.04,2209.96 2276,2009 2276,1408 2329,1355 R13.1@2545,1355
  Bottom Layer w11.81: v1(2055.35,2281.19) 2116.65,2281.19 J1.2@2119.96,2284.5
pads on no net: J1.11 J1.12 J1.13 J1.14 J1.48 J1.49 J1.50 J1.51 J1.52 J1.53 J1.54 J2.4 J2.5 J2.6 J2.7 J2.9 J2.10 J2.11 J2.12 J2.13 J2.14 J2.15 J2.21 J2.22 J2.23 J2.26 J2.27 J2.28 J2.29 J2.30 J2.32 J2.33 J2.34 J2.35 J2.36 J2.37 J2.38 J2.39 J2.40 J2.41 J2.42 J2.43 J2.44 J2.45 J2.46 J2.47 J2.48 J2.49 J2.50 J2.51 J2.52 J2.53 J2.54 J2.55 J2.56 J2.57 J2.58 J2.59 J2.60 U1.53 U1.54 U1.55 U1.92 U1.93 U1.94 U1.95 U1.101 U3.40 U4.1 U4.2 U4.3 U4.4 U4.5 U4.6 U4.10 U4.11 U4.14 U4.15 U4.20 U4.21 U4.22 U4.23 U4.24 U4.25 U4.26 U4.27 U4.28 U4.33 U4.34 U4.35 U4.38 U4.39 U4.40 U4.45 U4.46 U4.47 U4.48 U6.9 USB.4

## Polygon pours and split planes (outlines as drawn)
GND on Top Layer (solid, remove dead copper, pour order 0): 770,4705 775,4700 775,610 4945,610 4945,4705
GND on Bottom Layer (solid, remove dead copper, pour order 2): 770,4705 775,4700 775,610 4945,610 4945,4705
GND on GND (split plane): 4924.9,630.1 795.07,630.1 790.12,4684.9 4924.9,4684.9
VCC3.3M on PWR (split plane): 269 vertices, not listed, extent 945.1,1365.1 4087.69,4154.9
VDDA on PWR (split plane): 1374.9,2337.89 1374.9,2165 1375.29,2163.05 1376.4,2161.4 1411.4,2126.4 1413.05,2125.29 1415,2124.9 1542.89,2124.9 1594.9,2072.89 1594.9,1842.11 1537.89,1785.1 1257.11,1785.1 1125.1,1917.11 1125.1,2130 1124.71,2131.95 1123.6,2133.6 996.1,2261.1 990.1,2267.11 990.1,2394.9 1317.89,2394.9
VCC_LED on PWR (split plane): 3604.9,1715 3605.29,1713.05 3606.4,1711.4 3651.4,1666.4 3651.99,1666 3651.85,1665.29 3651.85,1078.05 3652.24,1076.1 3653.35,1074.45 3739.9,987.89 3739.9,745.1 2382.05,745.1 2382.05,974.84 2432.11,1024.9 2460,1024.9 2461.95,1025.29 2463.6,1026.4 2464.71,1028.05 2465.1,1030 2465.1,1130 2464.71,1131.95 2463.6,1133.6 2461.95,1134.71 2460,1135.1 2460,1280.1 2459.61,1282.05 2458.51,1283.7 2420.1,1322.11 2420.1,1707.89 2423.6,1711.4 2424.71,1713.05 2425.1,1715 2425.1,1929.9 2532.89,1929.9 2541.4,1921.4 2543.05,1920.29 2545,1919.9 2587.89,1919.9 2604.9,1902.89 2604.9,1575 2605.29,1573.05 2606.4,1571.4 2631.4,1546.4 2633.05,1545.29 2635,1544.9 2790,1544.9 2791.95,1545.29 2793.6,1546.4 2823.6,1576.4 2824.71,1578.05 2825.1,1580 2825.1,1875 2824.71,1876.95 2823.6,1878.6 2730.1,1972.11 2730.1,2242.89 2873.6,2386.4 2874.71,2388.05 2875.1,2390 2875.1,2499.9 3197.89,2499.9 3296.4,2401.4 3298.05,2400.29 3300,2399.9 3485,2399.9 3486.95,2400.29 3488.6,2401.4 3604.9,2517.69
VCC5 on PWR (split plane): 3686.4,4501.4 3688.05,4500.29 3690,4499.9 4667.89,4499.9 4689.9,4477.89 4689.9,4157.11 4677.89,4145.1 3566.66,4145.1 3564.71,4144.71 3563.06,4143.6 3561.95,4141.95 3561.65,4140.46 3426.95,4275.16 3427.21,4275.55 3427.6,4277.5 3427.21,4279.45 3426.1,4281.1 3425.1,4282.11 3425.1,4510.1 3424.71,4512.05 3423.6,4513.7 3323.7,4613.6 3322.05,4614.71 3320.1,4615.1 865,4615.1 863.05,4614.71 861.4,4613.6 860.29,4611.95 859.9,4610 859.9,2840 860.29,2838.05 861.4,2836.4 863.05,2835.29 865,2834.9 972.89,2834.9 1014.9,2792.89 1014.9,2712.11 856.4,2553.6 855.29,2551.95 854.9,2550 854.9,1460 855.29,1458.05 856.4,1456.4 889.45,1423.35 891.1,1422.24 893.05,1421.85 1286.95,1421.85 1288.9,1422.24 1290.55,1423.35 1291.66,1425 1292.01,1426.75 1783.6,1918.35 1784.71,1920 1785.1,1921.95 1785.1,2172.89 1812.11,2199.9 2170,2199.9 2171.95,2200.29 2173.6,2201.4 2230.2,2257.99 2231.3,2259.64 2231.69,2261.59 2231.69,2354.9 2377.89,2354.9 2409.9,2322.89 2409.9,2220 2409.9,2159.31 2340.69,2090.1 1886.4,2090.1 1884.45,2089.71 1882.79,2088.6 1881.69,2086.95 1881.3,2085 1881.3,2003.51 1841.4,1963.6 1840.29,1961.95 1840.15,1961.25 1839.45,1961.11 1837.79,1960 1836.69,1958.35 1836.3,1956.4 1836.3,1828.51 1396.4,1388.6 1395.29,1386.95 1394.9,1385 1394.9,987.11 1387.89,980.1 1175,980.1 1173.05,979.71 1171.4,978.6 977.89,785.1 794.88,785.1 790.12,4684.9 3502.89,4684.9
VCC3.3 on PWR (split plane): 323 vertices, not listed, extent 794.9,630.1 4924.9,4684.9

## Other copper
GND (plane layer: these items are gaps in the copper):
  rectangle: 785,620 795.07,630.1
  rectangle: 785,620 795.07,630.1
PWR (plane layer: these items are gaps in the copper):
  lines w10: 760,780 980,780 1175,975 1390,975 1400,985 1400,1385 1841.4,1826.4 1841.4,1956.4 ; 940,3644.9 1035,3644.9 ; 940,3650 940,3880 1094.9,3880 ; 985,2400 1196.95,2400 1320,2400 1380,2340 1380,2165 1415,2130 1545,2130 1600,2075 1600,1840 1540,1780 1255,1780 1120,1915 1120,2130 992.5,2257.5 ; 1000,2250 985,2265 985,2550 1000,2565 1285,2565 1300,2580 1300,2775 1315,2790 1455,2790 1470,2805 1470,3040 1465,3045 1310,3045 1298.05,3056.95 1298.05,3340 1604.9,3340 ; 1037.34,3650 1220.29,3832.95 1220.29,3856.95 ; 1094.9,3875.39 1094.9,4095 1094.9,4139.9 1115,4160 1230,4160 1265.1,4124.9 1265.1,4095 1265.1,4028.7 1353.8,3940 1730,3940 1740,3950 1905,3950 1924.71,3930.29 1924.71,3523.9 2889.71,3523.9 2910,3520 2910.64,3518.13 2910,3970 ; 1200,2405.1 1200,2435 1350,2585 1640,2585 1640,2455 1820,2275 1820,2210 ; 1225,3855 1720,3855 1730,3845 1730,3545 1630,3445 1630,3360 1610,3340 ; 1285,1426.95 1780,1921.95 1780,2175 1810,2205 2170,2205 2226.59,2261.59 2226.59,2360 2380,2360 2415,2325 2415,2220 2415,2157.2 2342.8,2085 1886.4,2085 1886.4,2001.4 1845,1960 2155,1960 2180,1935 2255,1935 2250,1930 2250,1810 2165,1725 1925,1725 1915,1715 1915,1400 1955,1360 2105,1360 2170,1425 2170,1625 2255,1710 2415,1710 2420,1715 2420,1935 2503.05,1935 ; 1286.95,1426.95 893.05,1426.95 860,1460 860,2550 1020,2710 1020,2795 975,2840 865,2840 865,4610 3320.1,4610 3420,4510.1 3420,4280 3422.5,4277.5 ; 2415,1712.99 2415,1320 2454.9,1280.1 2454.9,1124.9 ; 2460,1130 2460,1030 2430,1030 2376.95,976.95 2376.95,740 3745,740 3745,990 3656.95,1078.05 3656.95,1665.29 ; 2495.1,1935 2535,1935 2545,1925 2590,1925 2610,1905 2610,1575 2635,1550 2790,1550 2820,1580 2820,1875 2725,1970 2725,2245 2870,2390 2870,2505 3200,2505 3300,2405 3485,2405 3615.1,2535.1 ; 2911.95,3974.71 2911.95,4011.95 2970,4070 3255,4070 3360,3965 3360,3660 3485,3535 3485,3385 3660,3210 4050,3210 4090,3170 4090,2680 4100,2670 3655,2670 3610,2625 3610,1715 3655,1670 ; 3421.25,4273.65 3560,4134.9 3566.66,4134.9 ; 3500,4695 3690,4505 3700,4505 4670,4505 4695,4480 4695,4155 4680,4140 3566.66,4140

## Silkscreen, mask and mechanical layers (free items; w line width, h text height)
Top Overlay:
  text "String" at 2810,4355 h30
  text "Mainboard v1.7 / ECE477 Snr Dsn Grp12" at 885,1505 h120
  text "Yining Huang / Yuefan Fu / Zijun Lin / Fangrui Qin" at 3680,1200 h120
  text "String" at 3380,720 h30
Mechanical 1:
  lines w10: 770,615 770,4705 4945,4705 4945,610 775,610 770,615
Mechanical 4:
  lines w10: 775,610 775,4705 4945,4705 4945,610 775,610

## Text inside footprints (layer, text, board x,y; h text height)
J3: Top Overlay "40" at 4450.61,4192 h30; Top Overlay "1" at 3702.61,4196 h30